# Altium PCB ES_Class6C_2L.PcbDoc
Units mm, origin at the board's own origin, x right, y up, seen from the top; angles counter-clockwise.
Board outline 40.52 x 188.15 mm, 4 copper layers (Top Layer, Layer 1, Layer 2, Bottom Layer), stack 1.536 mm thick; 112 components, 90 nets, 408 pads, 9 vias.
Unrouted connection lines stored in the file: 277.
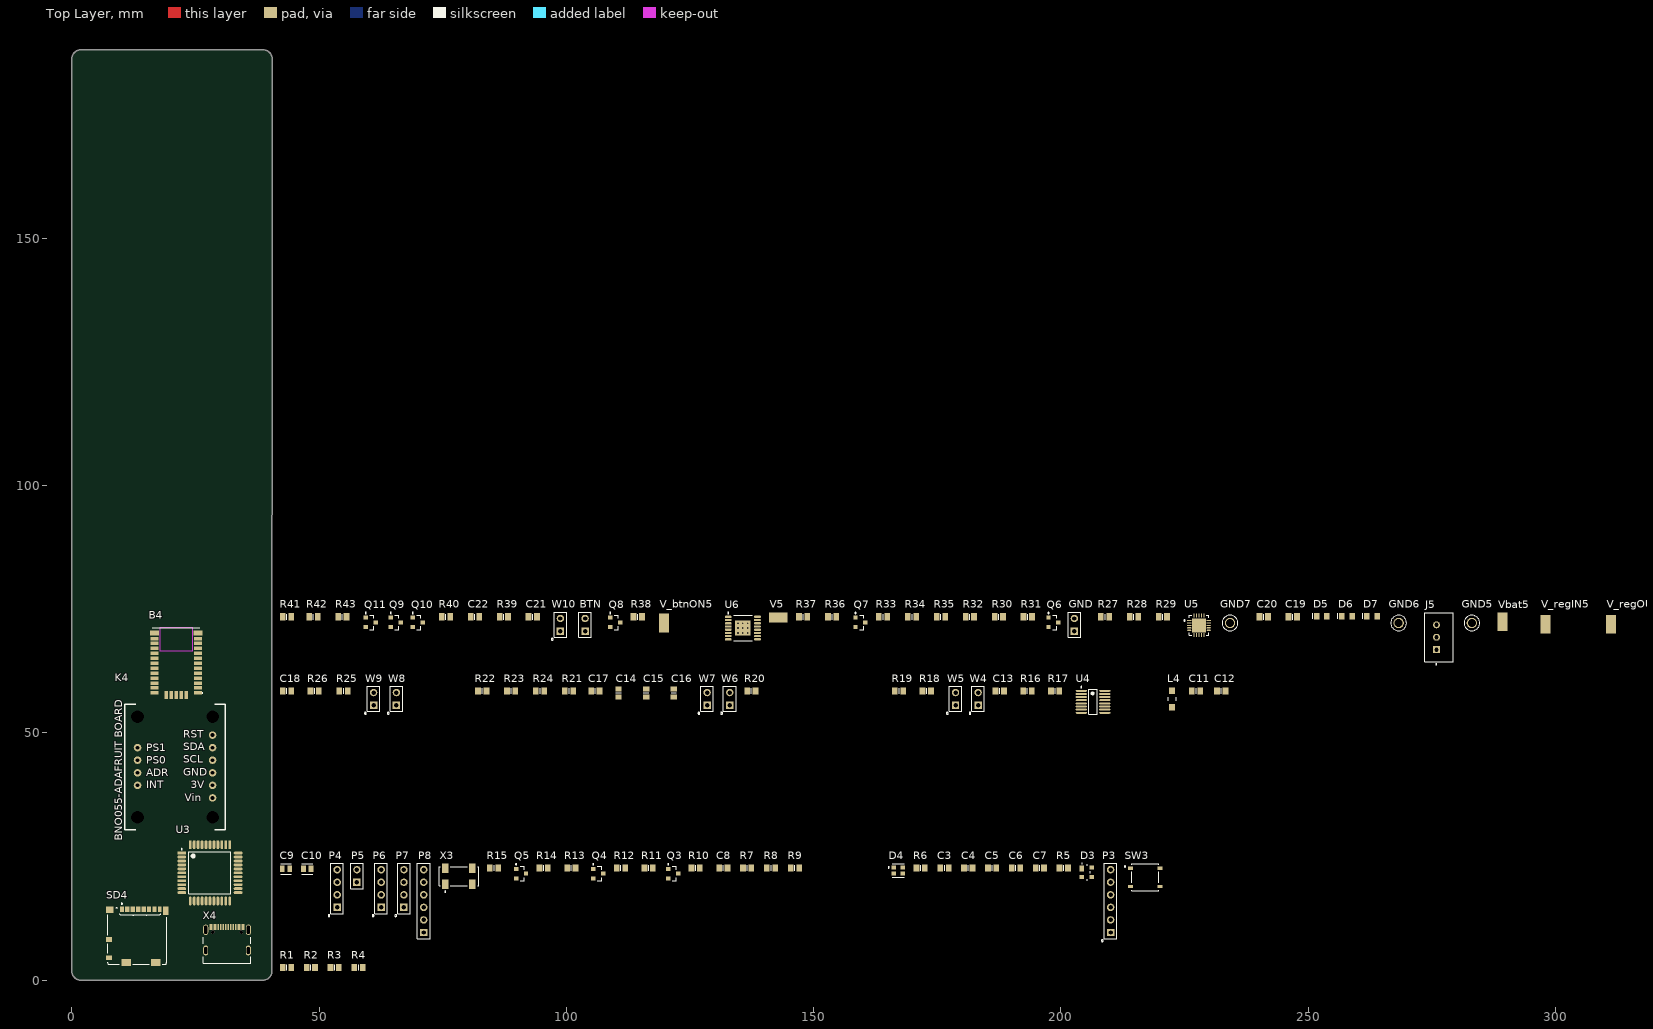
[diagram p0: Top Layer view]
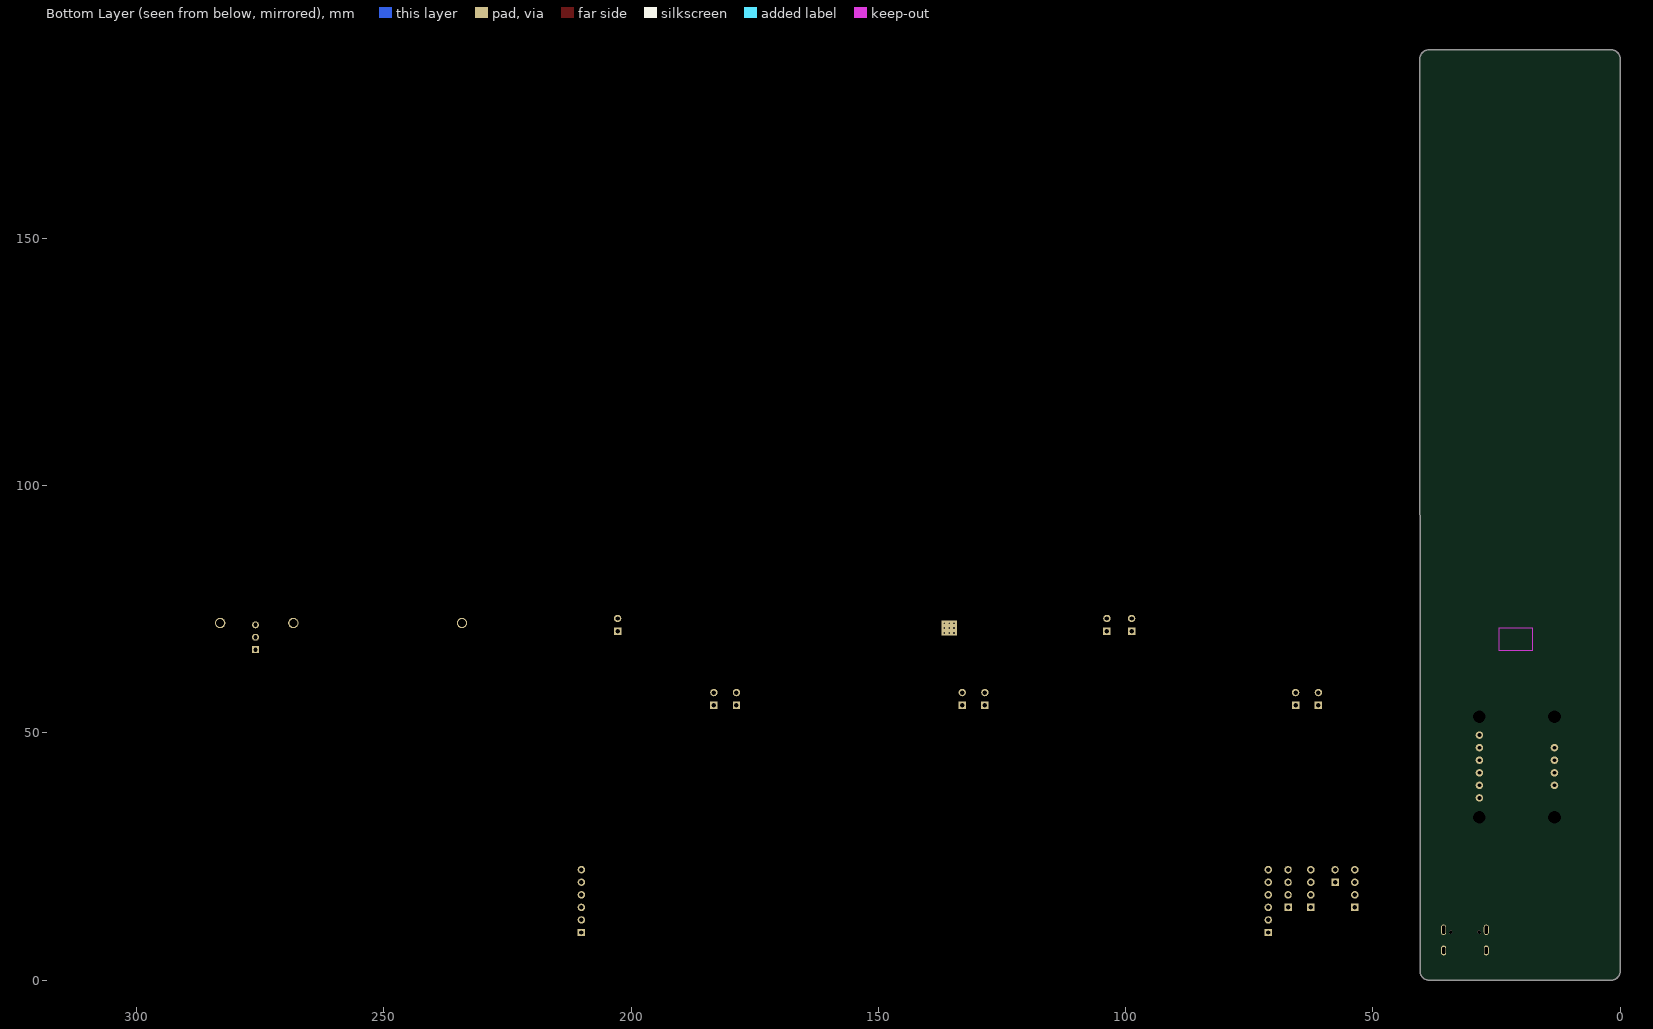
[diagram p1: Bottom Layer view, seen from below]

## Layer stack, top to bottom
Top Solder: solder mask 0.0102, Solder Resist, Dk 3.5
Top Layer: signal copper 0.018
Dielectric 1: prepreg 0.36, PP-001, Dk 3.9
Layer 1: signal copper 0.035
Dielectric1: core 0.71, FR-4, Dk 4.8
Layer 2: signal copper 0.035
Dielectric 2: prepreg 0.36, PP-001, Dk 3.9
Bottom Layer: signal copper 0.018
Bottom Solder: solder mask 0.0102, Solder Resist, Dk 3.5

## Board outline
1.85,0.012 cw(c1.85,1.863) 0,1.863 0.025,186.299 cw(c1.875,186.299) 1.875,188.15 38.645,188.15 cw(c38.645,186.275) 40.52,186.275 40.508,186.287 40.488,1.851 cw(c38.637,1.851) 38.637,0

## Design rules (kind name [scope] priority, off if disabled: settings)
BoardOutlineClearance [All] p1: gap=0.25 ignorepadtopadclearanceinfootprint=FALSE except(0: Arc-SplitContinuation Track-SplitContinuation SMDPad-SplitContinuation THPad-SplitContinuation Via-SplitContinuation Fill-SplitContinuation Poly-SplitContinuation Region-SplitContinuation Text-SplitContinuation)
Clearance Clearance-xPP-xTP-xTT [All] p1: gap=0.151 ignorepadtopadclearanceinfootprint=FALSE
ComponentClearance [All] p1: gap=0.25 collisioncheckmode=3 verticalgap=0.25 showdistances=FALSE
DiffPairsRouting [All] p1: maxlimit=0.25 minlimit=0.25 mostfreqgap=0.25 toplayer_minwidth=0.2 toplayer_maxwidth=0.381 toplayer_prefwidth=0.381 midlayer1_minwidth=0.2 midlayer1_maxwidth=0.381 midlayer1_prefwidth=0.381 midlayer2_minwidth=0.2 midlayer2_maxwidth=0.381 midlayer2_prefwidth=0.381 bottomlayer_minwidth=0.2 bottomlayer_maxwidth=0.381 bottomlayer_prefwidth=0.381 maxuncoupledlength=12.5
Height [All] p1: minheight=0 maxheight=25 prefheight=12.5
HoleSize HoleSize-PTH [All] p1: absolutevalues=TRUE maxlimit=10 minlimit=0.25 maxpercent=80.000 minpercent=20.000
HoleToHoleClearance [All] p1: gap=0.35 allowstackedmicrovias=TRUE
MinimumAnnularRing "Minimum IAR  >0.45mm" [((ObjectKind = 'Pad') OR (ObjectKind = 'Via')) And (Layer = 'MultiLayer') And (HoleDiameter > AsMM(0.45))] p1: minimumring=0.175 // minimum inner annular ring for pads > 0.45mm finished hole size
MinimumAnnularRing "Minimum IAR <=0.45mm" [((ObjectKind = 'Pad') OR (ObjectKind = 'Via')) And (Layer = 'MultiLayer') And (HoleDiameter <= AsMM(0.45))] p2: minimumring=0.175 // minimum inner annular ring for pads <= 0.45mm finished hole size
MinimumSolderMaskSliver [All] p1: minsoldermaskwidth=0.08
PasteMaskExpansion [All] p1: expansion=-0.025
PlaneClearance PlaneClearance-IPI [All] p1: clearance=0.25
PlaneConnect [All] p1: planeconnectstyle=Relief reliefexpansion=0.175 reliefentries=4 reliefconductorwidth=0.2 reliefairgap=0.2
PolygonConnect DirectVia [All vs IsNamedPolygon('GND_L01_P005') Or IsNamedPolygon('+3V3_L02_P000') Or IsNamedPolygon('GND_L03_P006') Or IsNamedPolygon('GND_L04_P008')] p1: thpad.connectstyle=Relief thpad.reliefconductorwidth=0.254 thpad.reliefentries=4 thpad.polygonreliefangle="90 Angle" thpad.airgapwidth=0.254 smdpad.connectstyle=Relief smdpad.reliefconductorwidth=0.254 smdpad.reliefentries=4 smdpad.polygonreliefangle="90 Angle" smdpad.airgapwidth=0.254 via.connectstyle=Direct via.reliefconductorwidth=0.254 via.reliefentries=4 via.polygonreliefangle="90 Angle" via.airgapwidth=0.254
PolygonConnect PolygonConnect-xTW [All] p2: connectstyle=Relief reliefconductorwidth=0.2 reliefentries=4 polygonreliefangle="90 Angle" airgapwidth=0.2
RoomDefinition U_Power [InComponentClass('U_Power')] p1: confinementstyle=ConfineIn formatcopy=TRUE lockcomponents=FALSE outline 41.644,63.486 323.932,63.486 323.932,77.187 41.644,77.187
RoomDefinition U_MCU [InComponentClass('U_MCU')] p2: confinementstyle=ConfineIn formatcopy=TRUE lockcomponents=FALSE outline 41.669,7.559 220.927,7.559 220.927,26.41 41.669,26.41
RoomDefinition SchemaBloc [InComponentClass('SchemaBloc')] p3: confinementstyle=ConfineIn formatcopy=TRUE lockcomponents=FALSE outline 41.644,1.408 59.969,1.408 59.969,6.284 41.644,6.284
RoutingCorners [All] p1: cornerstyle=45-Degree minsetback=2.5 maxsetback=2.5
RoutingVias RoutingViasES [All] p1: holewidth=0.3 width=0.65 viastyle="Through Hole" minholewidth=0.25 minwidth=0.61 maxholewidth=0.45 maxwidth=0.8 // finishet hole size <= 0.45mm
SilkToSilkClearance [All] p1: silktosilkclearance=0.2
SilkToSolderMaskClearance SilkscreenOverComponentPads [IsPad] p1: minsilkscreentomaskgap=0.2 clearancetoexposedcopper=TRUE
SolderMaskExpansion [All] p1: expansion=0 istentingtop=FALSE
UnRoutedNet [All] p1: checkbadconnections=TRUE
Width Width-xTW [All] p1: maxlimit=1.5 minlimit=0.15 preferedwidth=0.2
17 further rules are at their usual default settings.

## Classes and differential pairs
component class U_Power: BTN C19 C20 C21 C22 D5 D6 D7 GND GND5 GND6 GND7 GND? J5 MP5 MP6 MP7 MP8 MP9 Q6 Q7 Q8 Q9 Q10 Q11 R27 R28 R29 R30 R31 R32 R33 R34 R35 R36 R37 R38 R39 R40 R41 R42 R43 U5 U6 V5 V? V_btnON5 V_btnON? V_regIN5 V_regIN? V_regOUT5 V_regOUT? Vbat5 Vbat? W10
component class U_Peripherals: B4 C11 C12 C13 C14 C15 C16 C17 C18 K4 L4 R16 R17 R18 R19 R20 R21 R22 R23 R24 R25 R26 SD4 SD? U4 W4 W5 W6 W7 W8 W9 X4
component class U_MCU: C3 C4 C5 C6 C7 C8 C9 C10 D3 D4 P3 P4 P5 P6 P7 P8 Q3 Q4 Q5 R5 R6 R7 R8 R9 R10 R11 R12 R13 R14 R15 S3 SW3 U3 X3
component class SchemaBloc: R1 R2 R3 R4
differential pair D: +D_P -D_N
differential pair DR: +DR_P -DR_N

## Components (designator, comment, footprint, x,y, rotation, side; value= is the part's Value field where it differs from the comment)
B4 "CAM-M8C-0" CAMM8C0 21.125,64.3 r0 top
BTN "Button connector" HDR1X2 103.797,70.612 r90 top
C3 "100nF" Cap_0805 176.475,22.684 r0 top
C4 "100nF" Cap_0805 181.275,22.684 r0 top
C5 "100nF" Cap_0805 186.101,22.684 r0 top
C6 "100nF" Cap_0805 190.926,22.684 r0 top
C7 "100nF" Cap_0805 195.751,22.684 r0 top
C8 "10uF" Cap_0805 131.748,22.684 r0 top
C9 "C0805C180J5GACTU" FP-C0805C-DN-MFG 43.319,22.534 r0 top value="18 pF"
C10 "C0805C180J5GACTU" FP-C0805C-DN-MFG 47.619,22.534 r0 top value="18 pF"
C11 "100nF" Cap_0805 227.328,58.511 r0 top
C12 "4.7uF" Cap_0805 232.428,58.511 r0 top
C13 "100nF" Cap_0805 187.651,58.511 r0 top
C14 "10nF" 6-0805_L 110.547,58.086 r90 top
C15 "47pF" 6-0805_L 116.147,58.086 r90 top
C16 "47pF" 6-0805_L 121.722,58.086 r90 top
C17 "10nF" Cap_0805 105.872,58.511 r0 top
C18 "4.7uF" Cap_0805 43.519,58.511 r0 top
C19 "4.7uF, 35V" Cap_0805 246.879,73.487 r0 top
C20 "10uF, 10V" Cap_0805 241.028,73.487 r0 top value=10uF
C21 "4.7uF, 35V" Cap_0805 93.221,73.487 r0 top
C22 "6.8uF, 10V" Cap_0805 81.52,73.487 r0 top
D3 "BAS40-07" INF-SOT143_V 205.252,21.834 r0 top
D4 "ASMB-KTF0-0A306" FP-PLCC-4-MFG 167.1,22.209 r0 top
D5 "Super Red, 1.9 V" WL-SMCW_0805_150080xx75000 252.754,73.612 r0 top
D6 "Super Red, 1.9 V" WL-SMCW_0805_150080xx75000 257.854,73.612 r0 top
D7 "Super Red, 1.9 V" WL-SMCW_0805_150080xx75000 262.929,73.612 r0 top
GND "Header 2" HDR1X2 202.726,70.612 r90 top
GND5 "5011" KSTN-5011_V 283.105,72.237 r0 top
GND6 "5011" KSTN-5011_V 268.305,72.237 r0 top
GND7 "5011" KSTN-5011_V 234.203,72.237 r0 top
J5 "B3B-XH-A(LF)(SN)" FP-B3B-XH-A_LF_SN-MFG 276.48,69.362 r90 top
K4 "BNO055-ADAFRUIT" BNO055-ADAFRUIT 31.08,30.393 r90 top
L4 "742792133" SMD-1206 222.502,56.886 r90 top
P3 "Header 6" HDR1X6 210.052,9.659 r90 top
P4 "Header 4" HDR1X4 53.669,14.734 r90 top
P5 "Header 2" HDR1X2 57.669,19.809 r90 top
P6 "Header 4" HDR1X4 62.57,14.734 r90 top
P7 "Header 4" HDR1X4 67.17,14.734 r90 top
P8 "Header 6" HDR1X6 71.17,9.659 r90 top
Q3 "BSS138LT1G" ONSC-SOT-23-3-318-08_V 121.597,21.559 r0 top
Q4 "BSS138LT1G" ONSC-SOT-23-3-318-08_V 106.472,21.559 r0 top
Q5 "BSS138LT1G" ONSC-SOT-23-3-318-08_V 90.846,21.559 r0 top
Q6 "NVR1P02T1G" ONSC-SOT-23-3-318-08_V 198.501,72.362 r0 top
Q7 "BSS138LT1G" ONSC-SOT-23-3-318-08_V 159.474,72.362 r0 top
Q8 "NVR1P02T1G" ONSC-SOT-23-3-318-08_V 109.872,72.362 r0 top
Q9 "BSS138LT1G" ONSC-SOT-23-3-318-08_V 65.52,72.362 r0 top
Q10 "BSS138LT1G" ONSC-SOT-23-3-318-08_V 69.945,72.362 r0 top
Q11 "BSS138LT1G" ONSC-SOT-23-3-318-08_V 60.444,72.362 r0 top
R1 "50k" RES_0805 43.519,2.583 r0 top value=1k
R2 "50k" RES_0805 48.344,2.583 r0 top value=1k
R3 "50k" RES_0805 53.169,2.583 r0 top value=1k
R4 "50k" RES_0805 57.994,2.583 r0 top value=1k
R5 "47k" RES_0805 200.576,22.684 r0 top value=1K
R6 "1k" RES_0805 171.65,22.684 r0 top value=1K
R7 "430R" RES_0805 136.573,22.684 r0 top value=180R
R8 "430R" RES_0805 141.398,22.684 r0 top value=33R
R9 "430R" RES_0805 146.224,22.684 r0 top value=39R
R10 "430R" RES_0805 126.148,22.684 r0 top
R11 "10k" RES_0805 116.647,22.684 r0 top
R12 "430R" RES_0805 111.047,22.684 r0 top
R13 "10k" RES_0805 101.021,22.684 r0 top
R14 "430R" RES_0805 95.421,22.684 r0 top
R15 "10k" RES_0805 85.396,22.684 r0 top
R16 "5k1" RES_0805 193.251,58.511 r0 top
R17 "5k1" RES_0805 198.851,58.511 r0 top
R18 "27R" RES_0805 172.875,58.511 r0 top
R19 "27R" RES_0805 167.275,58.511 r0 top
R20 "10k" RES_0805 137.423,58.511 r0 top
R21 "15k" RES_0805 100.546,58.511 r0 top
R22 "10k" RES_0805 82.996,58.511 r0 top
R23 "10k" RES_0805 88.846,58.511 r0 top
R24 "10k" RES_0805 94.696,58.511 r0 top
R25 "220R" RES_0805 54.969,58.511 r0 top
R26 "220R" RES_0805 49.119,58.511 r0 top
R27 "270R" RES_0805 208.927,73.487 r0 top
R28 "270R" RES_0805 214.777,73.487 r0 top
R29 "270R" RES_0805 220.627,73.487 r0 top
R30 "39k" RES_0805 187.451,73.487 r0 top
R31 "39k" RES_0805 193.301,73.487 r0 top
R32 "39k" RES_0805 181.6,73.487 r0 top
R33 "10k" RES_0805 164.049,73.487 r0 top
R34 "6k2" RES_0805 169.9,73.487 r0 top
R35 "2.2k" RES_0805 175.75,73.487 r0 top
R36 "10k" RES_0805 153.749,73.487 r0 top
R37 "270R" RES_0805 147.899,73.487 r0 top
R38 "100k" RES_0805 114.447,73.487 r0 top
R39 "6k2" RES_0805 87.371,73.487 r0 top
R40 "10k" RES_0805 75.67,73.487 r0 top
R41 "39k" RES_0805 43.519,73.487 r0 top
R42 "10k" RES_0805 48.869,73.487 r0 top
R43 "10k" RES_0805 54.719,73.487 r0 top
SD4 "104031-0811" MOLX-104031-0811_V 13.253,8.988 r180 top
SW3 "PTS526SK15SMTR2LFS" FP-PTS526SK15SMTR2LFS-MFG 217.077,20.809 r0 top
U3 "PIC32MX274F256D-I/PT" FP-C04-076-IPC_A 27.95,21.725 r0 top
U4 "FT230XS-U" SSOP-16_N 206.502,56.311 r0 top
U5 "MCP73871T-2CCI/ML" Microchip_C04-126_IPC_B 227.928,71.762 r0 top
U6 "MAX1793EUE33+" TSOP65P640X110_HS-17N 135.698,71.212 r0 top
V5 "3.3V" KSTN-5019_V 142.873,73.387 r0 top
V_btnON5 "VBOI" KSTN-5019_V 119.722,72.237 r90 top
V_regIN5 "Vcharge" KSTN-5019_V 297.981,71.987 r90 top
V_regOUT5 "Vregu" KSTN-5019_V 311.207,71.987 r90 top
Vbat5 "Vbat" KSTN-5019_V 289.331,72.487 r90 top
W4 "Jumper" JUMPER 183.275,55.636 r90 top
W5 "Jumper" JUMPER 178.7,55.636 r90 top
W6 "Jumper" JUMPER 133.048,55.636 r90 top
W7 "Jumper" JUMPER 128.473,55.636 r90 top
W8 "Jumper" JUMPER 65.645,55.636 r90 top
W9 "Jumper" JUMPER 61.044,55.636 r90 top
W10 "Jumper" JUMPER 98.796,70.612 r90 top
X3 "ABS25-32.768KHZ-6-T" ABRA-ABS25-4_V 78.27,21.034 r0 top
X4 "USB4105-GF-A" GCT_USB4105-GF-A 31.4,6.025 r0 top

## Footprints (in the part's own frame and the unit in brackets; to place one, negate y for a bottom-side part, rotate by r counter-clockwise, add the part's x,y. Pads: shape width x height; smd on the part's side, far side on the other; paste and mask are expansions set on the pad)
6-0805_L [mm] "Chip Resistor, Body 2.0x1.2mm, IPC High Density"
  rect 1x1.3 smd: 1(-0.8,0) 2(0.8,0)
  silkscreen extent 0,-0.55 0,0.55, body extent -1.07,-0.7 1.07,0.7, height 0.7
ABRA-ABS25-4_V [mm] "SMD, 4-Leads, Body 8x3.8mm, Pitch 5.5mm, Height 2.5mm"
  rect 1.3x1.9 smd: 1(-2.75,-1.6) 2(2.75,-1.6) 3(2.75,1.6) 4(-2.75,1.6)
  silkscreen extent -4,-3.22 4,1.9, body extent -4,-2 4,2, height 2.66
BNO055-ADAFRUIT [mil]
  round 60 hole 30: 1(255,102.5) 2(355,102.5) 3(455,102.5) 4(555,102.5) 5(655,102.5) 6(755,102.5) 7(355,700.02) 8(455,700.02) 9(555,700.02) 10(655,700.02)
  round 60 hole 100: M(100,700) M(100,100) M(900,100) M(900,700)
  silkscreen extent 0,0 1000,800, body extent 5,3 1005,803, height 539
CAMM8C0 [mm]
  rect 1.6x0.7 smd: 1(4.425,-6.2) 2(4.425,-5.2) 3(4.425,-4.2) 4(4.425,-3.2) 5(4.425,-2.2) 6(4.425,-1.2) 7(4.425,-0.2) 8(4.425,0.8) 9(4.425,1.8) 10(4.425,2.8) 11(4.425,3.8) 12(4.425,4.8) 15(-4.425,4.8) 16(-4.425,3.8) 17(-4.425,2.8) 18(-4.425,1.8) 19(-4.425,0.8) 20(-4.425,-0.2) 21(-4.425,-1.2) 22(-4.425,-2.2) 23(-4.425,-3.2) 24(-4.425,-4.2) 25(-4.425,-5.2) 26(-4.425,-6.2)
  rect 1.8x1 smd: 13(4.425,5.95) 14(-4.425,5.95)
  rect 0.7x1.6 smd: 27(-2,-6.625) 28(-1,-6.625) 29(0,-6.625) 30(1,-6.625) 31(2,-6.625)
  Keep-Out Layer region: -3.302,2.286 3.302,2.286 3.302,6.985 -3.302,6.985
  silkscreen extent -4.8,-6.25 5.4,7, body extent -4.83,-7 4.77,7, height 2.19
Cap_0805 [mm]
  rect 1.15x1.45 smd: 1(-0.85,0) 2(0.85,0)
  silkscreen extent 0,-0.55 0,0.55, body extent -0.95,-0.6 1.05,0.65, height 0.94
FP-B3B-XH-A_LF_SN-MFG [mm]
  rect 1.4x1.4 hole 0.9 paste-1000 mask+0: 1(-2.5,0.525)
  round 1.4 hole 0.9 paste-1000 mask+0: 2(0,0.525) 3(2.5,0.525)
  silkscreen extent -5.6,-2.88 4.95,2.88, body extent -5.05,-2.98 5.05,2.98, height 0.25
FP-C04-076-IPC_A [mm]
  rect 1.788x0.566 smd paste+0 mask+0: 1(-5.691,4)
  rrect100% 1.788x0.566 smd paste+0 mask+0: 2(-5.691,3.2) 3(-5.691,2.4) 4(-5.691,1.6) 5(-5.691,0.8) 6(-5.691,0) 7(-5.691,-0.8) 8(-5.691,-1.6) 9(-5.691,-2.4) 10(-5.691,-3.2) 11(-5.691,-4) 23(5.691,-4) 24(5.691,-3.2) 25(5.691,-2.4) 26(5.691,-1.6) 27(5.691,-0.8) 28(5.691,0) 29(5.691,0.8) 30(5.691,1.6) 31(5.691,2.4) 32(5.691,3.2) 33(5.691,4)
  rrect100% 0.566x1.788 smd paste+0 mask+0: 12(-4,-5.691) 13(-3.2,-5.691) 14(-2.4,-5.691) 15(-1.6,-5.691) 16(-0.8,-5.691) 17(0,-5.691) 18(0.8,-5.691) 19(1.6,-5.691) 20(2.4,-5.691) 21(3.2,-5.691) 22(4,-5.691) 34(4,5.691) 35(3.2,5.691) 36(2.4,5.691) 37(1.6,5.691) 38(0.8,5.691) 39(0,5.691) 40(-0.8,5.691) 41(-1.6,5.691) 42(-2.4,5.691) 43(-3.2,5.691) 44(-4,5.691)
  silkscreen extent -5.82,-4.25 4.25,4.92, body extent -7.09,-7.09 7.09,7.09, height 0.25
FP-C0805C-DN-MFG [mm]
  rect 0.95x1.35 smd paste+0 mask+0: 1(-0.75,0) 2(0.75,0)
  silkscreen extent -1.1,-1.07 1.1,1.07, body extent -1.4,-0.85 1.4,0.85, height 0.25
FP-PLCC-4-MFG [mm]
  rect 0.9x0.8 smd paste+0 mask+0: 1(-0.9,0.6) 2(-0.9,-0.6) 3(0.9,-0.6) 4(0.9,0.6)
  silkscreen extent -2.02,-1.4 1.2,1.4, body extent -1.45,-1.2 1.45,1.2, height 0.25
FP-PTS526SK15SMTR2LFS-MFG [mm]
  rect 1x0.7 smd paste+0 mask+0: 1(-3,1.85) 2(3,1.85) 3(-3,-1.85) 4(3,-1.85)
  silkscreen extent -4.25,-2.7 2.7,2.7, body extent -3.6,-2.8 3.6,2.8, height 0.25
GCT_USB4105-GF-A [mm]
  rect 0.6x1.15 smd: A1B12(-3.2,4.755) A4B9(-2.4,4.755) B1A12(3.2,4.755) B4A9(2.4,4.755)
  rect 0.3x1.15 smd: A5(-1.25,4.755) A6(-0.25,4.755) A7(0.25,4.755) A8(1.25,4.755) B5(1.75,4.755) B6(0.75,4.755) B7(-0.75,4.755) B8(-1.75,4.755)
  oval 1.05x2.1 hole 0.6 slot 1.7 at 90 deg: S1(-4.32,4.18) S4(4.32,4.18)
  oval 1x2 hole 0.6 slot 1.4 at 90 deg: S2(-4.32,0) S3(4.32,0)
  round 0.65 hole 0.65 unplated: ""(-2.89,3.68) ""(2.89,3.68)
  silkscreen extent -4.79,-2.6 4.79,2.65, body extent -4.47,-2.59 4.47,5.11, height 3.26
HDR1X2 [mm] "Connector; Header; 2 Position"
  rect 1.5x1.5 hole 0.9: 1(0,0)
  round 1.5 hole 0.9: 2(2.54,0)
  silkscreen extent -1.27,-1.27 3.81,1.27
HDR1X4 [mm] "Connector; Header; 4 Position"
  rect 1.5x1.5 hole 0.9: 1(0,0)
  round 1.5 hole 0.9: 2(2.54,0) 3(5.08,0) 4(7.62,0)
  silkscreen extent -1.85,-1.27 8.89,1.85, body extent -1.27,-1.27 8.89,1.27, height 9.5
HDR1X6 [mm] "Connector; Header; 6 Position"
  rect 1.5x1.5 hole 0.9: 1(0,0)
  round 1.5 hole 0.9: 2(2.54,0) 3(5.08,0) 4(7.62,0) 5(10.16,0) 6(12.7,0)
  silkscreen extent -1.85,-1.27 13.97,1.85, body extent -1.27,-1.27 13.97,1.27, height 9.5
INF-SOT143_V [mm] "SOT143, 4-Leads, Body 2.9x1.3 mm"
  rect 0.9x1.2 smd: 1(-1,0.8)
  rect 0.9x0.8 smd: 2(-1,-1) 3(1,-1) 4(1,1)
  silkscreen extent -1.05,-1.5 0.7,1.85, body extent -0.65,-1.45 0.65,1.45, height 1.1
JUMPER [mm] "Connector; Header; 2 Position"
  rect 1.5x1.5 hole 0.9: 1(0,0)
  round 1.5 hole 0.9: 2(2.54,0)
  silkscreen extent -1.85,-1.27 3.81,1.85, body extent -1.33,-1.27 3.87,1.27, height 8.6
KSTN-5011_V [mm] "Test Point, Dia 3.17mm"
  round 2.1 hole 1.6: 1(0,0)
  silkscreen extent -1.59,-1.58 1.59,1.58, body extent -1.59,-1.59 1.59,1.59, height 8.13
KSTN-5019_V [mm] "Test Point, 1-Leads, Body 3.81x2.03mm"
  rect 3.8x2.03 smd: 1(0,0)
  body extent -1.9,-1.01 1.9,1.02, height 2.29
Microchip_C04-126_IPC_B [mm]
  rect 0.829x0.239 smd paste+0 mask+0: 1(-1.97,1)
  rrect100% 0.829x0.239 smd paste+0 mask+0: 2(-1.97,0.5) 3(-1.97,0) 4(-1.97,-0.5) 5(-1.97,-1) 11(1.97,-1) 12(1.97,-0.5) 13(1.97,0) 14(1.97,0.5) 15(1.97,1)
  rrect100% 0.239x0.829 smd paste+0 mask+0: 6(-1,-1.97) 7(-0.5,-1.97) 8(0,-1.97) 9(0.5,-1.97) 10(1,-1.97) 16(1,1.97) 17(0.5,1.97) 18(0,1.97) 19(-0.5,1.97) 20(-1,1.97)
  rect 2.8x2.8 smd paste-1000 mask+0: 21(0,0)
  silkscreen extent -3.05,-2 2,2, body extent -2.54,-2.5 2.72,2.76, height 0.25
MOLX-104031-0811_V [mm] "Micro SD, 8-Leads, Body 11.95x11.4mm, Pitch 1.1mm"
  rect 0.85x1.1 smd: 1(3.113,-5.412) 2(2.013,-5.412) 3(0.913,-5.412) 4(-0.188,-5.412) 5(-1.288,-5.412) 6(-2.387,-5.412) 7(-3.487,-5.412)
  rect 0.75x1.1 smd: 8(-4.537,-5.412)
  rect 1.2x1 smd: 9(5.748,0.738) 10(5.748,4.438)
  rect 1.55x1.35 smd: 11(5.573,-5.287)
  rect 1.17x1.8 smd: 12(-5.747,-5.062)
  rect 1.9x1.35 smd: 13(-3.722,5.413) 14(2.248,5.413)
  silkscreen extent -5.97,-6.64 5.98,5.74, body extent -5.97,-5.66 5.98,5.74, height 1.45
ONSC-SOT-23-3-318-08_V [mm] "SOT23, 3-Leads, Body 2.92x1.3mm, Pitch 0.95mm"
  rect 0.9x0.8 smd: 1(-1,0.95) 2(-1,-0.95) 3(1,0)
  silkscreen extent -1.12,-1.46 0.65,2.02, body extent -0.65,-1.46 0.65,1.46, height 1.11
RES_0805 [mm]
  rect 1.15x1.45 smd: 1(-0.85,0) 2(0.85,0)
  silkscreen extent 0,-0.55 0,0.55, body extent -0.97,-0.64 1.03,0.62, height 0.51
SMD-1206 [mm] "Chip Inductor, 2-Leads, Body 3.2x1.6mm"
  rect 1.35x1.2 smd: 1(-1.675,0) 2(1.675,0)
  silkscreen extent -0.35,-0.8 0.35,0.8, body extent -1.6,-0.8 1.6,0.8, height 1.09
SSOP-16_N [mm] "SOP, 16-Leads, Body 4.9x3.9mm, Pitch 0.635mm, IPC Medium Density"
  oval 2.25x0.4 smd: 1(-2.375,2.222) 2(-2.375,1.587) 3(-2.375,0.953) 4(-2.375,0.318) 5(-2.375,-0.318) 6(-2.375,-0.953) 7(-2.375,-1.587) 8(-2.375,-2.222) 9(2.375,-2.222) 10(2.375,-1.587) 11(2.375,-0.953) 12(2.375,-0.318) 13(2.375,0.318) 14(2.375,0.953) 15(2.375,1.587) 16(2.375,2.222)
  silkscreen extent -2.5,-2.5 0.9,3.1, body extent -1.99,-2.5 1.99,2.5, height 1.76
TSOP65P640X110_HS-17N [mm] "TSOP, 16-Leads, Body 5.00x4.40mm, Pitch 0.65mm, Thermal Pad 3.10x3.10mm, IPC Medium Density"
  oval 1.4x0.45 smd: 1(-2.95,2.275) 2(-2.95,1.625) 3(-2.95,0.975) 4(-2.95,0.325) 5(-2.95,-0.325) 6(-2.95,-0.975) 7(-2.95,-1.625) 8(-2.95,-2.275) 9(2.95,-2.275) 10(2.95,-1.625) 11(2.95,-0.975) 12(2.95,-0.325) 13(2.95,0.325) 14(2.95,0.975) 15(2.95,1.625) 16(2.95,2.275)
  rect 3.1x3.1 smd: 10(0,0)
  rect 3.1x3.1 smd far side: 10(0,0)
  silkscreen extent -3.07,-2.55 1.85,3.17, body extent -3.19,-2.55 3.19,2.55, height 1.1
WL-SMCW_0805_150080xx75000 [mm] "SMD Mono-color Chip LED, body 2.0x1.25mm"
  rect 1.1x1.3 smd: 1(-1.05,0) 2(1.05,0)
  silkscreen extent -2,-0.6 -1.8,0.6, body extent -1,-0.63 1,0.62, height 0.7

## Part data
B4: "RF RCVR GNSS/GPS 1.575GHZ MODULE", Manufacturer_Name=U-Blox, Mouser Part Number=377-CAM-M8C-0, Supplier Part Number 1=672-CAM-M8C-0CT-ND, Datasheet Link=https://www.mouser.cn/ProductDetail/u-blox/CAM-M8C-0?qs=%2Fha2pyFadui7ZmsGRBrJBt%252BuEsnOsR2xV%252BdWTisaE9ttYO2aX8ol3A%3D%3D, Geometry.Height=2.3mm, Manufacturer_Part_Number=CAM-M8C-0, Mouser Price/Stock=https://www.mouser.co.uk/ProductDetail/u-blox/CAM-M8C-0?qs=vEM7xhTegWh0Qdx4vzEerw%3D%3D, Supplier 1=Digi-Key
BTN: library part "Header 2", "Header, 2-Pin", LatestRevisionDate=17-Jul-2002, LatestRevisionNote="Re-released for DXP Platform.", Publisher="Altium Limited"
C3 C4 C5 C6 C7 C8 C11 C12 C13 C18: library part C, PCB Footprint=RC0805, SDTSourceLibName=C:\WINDOWS\TEMP\DA.LIB
C9 C10: library part CMP-2007-00302-2, "CAP CER 18PF 50V C0G/NP0 0805", Capacitance="18 pF", Manufacturer=KEMET, Package=C0805C-DN, Temperature="-55°C to +125°C", Temperature Characteristic=C0G, Temperature Coefficient=30ppm/°C, Temperature Range High=+125°C, Temperature Range Low=-55°C, Tolerance=0.05, Voltage Rating="50 V", Automotive=No, Category=Cap, ComponentLink2Description=Datasheet, ComponentLink2URL=https://content.kemet.com/datasheets/KEM_C1003_C0G_SMD.pdf, Device Class L1="Passive Components", Device Class L2=Capacitors, Device Class L3="Ceramic Capacitors", Digikey Description="CAP CER 18PF 50V C0G/NP0 0805", Height=0.88mm, Ipc Land Pattern Name=CAPC200125X78, Lead Free=Yes, Manufacturer Part Number=C0805C180J5GACTU, Material=Ceramic, Mouser Description="Cap Ceramic 18pF 50V C0G 5% SMD 0805 125C Paper T/R", Octopart=https://octopart.com/c0805c180j5gactu-kemet-144810, RoHS=TRUE
C14 C15 C16 C17: library part Cap, "Capacitor", LatestRevisionDate=17-Jul-2002, LatestRevisionNote="Re-released for DXP Platform.", PackageDescription="Radial Cap, Thru-Hole; 2 Leads; 0.3 in Pin Spacing", PackageReference=RAD-0.3, Published=8-Jun-2000, Publisher="Altium Limited"
C19 C21: library part CMP-08246-002735-1, "Multilayer Ceramic Capacitors 4.7μF ±10% 35V X7R SMD 0805", Capacitance=4.7uF, Case Code (Imperial)=0805, Case Code (Metric)=2012, Dielectric=X7R, Dielectric Material=Ceramic, Max Operating Temperature=125°C, Min Operating Temperature=-55°C, Package Quantity=2000, Tolerance=10%, Voltage Rating=35V, Case/Package=0805, Construction=Flat, Depth=1.25mm, Height=1.25mm, Lead Free="Lead Free", Length=2mm, Mount="Surface Mount", Packaging="Tape and Reel", Radiation Hardening=No, REACH SVHC="No SVHC", RoHS Compliant=Yes, Series=C, Termination=SMD/SMT, Thickness=0.057inch, Voltage Rating (DC)=35V, Weight=0.000194oz, Width=0.049inch
C20: library part CMP-2007-03243-2, "CAP CER 10UF 10V X5R 0805", 3DS Part Number=220-00001, Capacitance=10uF, Manufacturer=Kemet, Manufacturer Part Number=C0805C106K8PACTU, Package=C0805C-DG, Temperature="-55°C to +85°C", Temperature Characteristic=X5R, Temperature Coefficient=15%, Temperature Range High=+85°C, Temperature Range Low=-55°C, Tolerance=10%, Voltage=10V, Automotive=No, Category=Cap, ComponentLink2Description=Datasheet, ComponentLink2URL=https://content.kemet.com/datasheets/KEM_C1006_X5R_SMD.pdf, Device Class L1="Passive Components", Device Class L2=Capacitors, Device Class L3="Ceramic Capacitors", Digikey Description="CAP CER 10UF 10V X5R 0805", Height=1.4mm, Ipc Land Pattern Name=CAPC200125X125, Lead Free=Yes, Material=Ceramic, Mouser Description="CAP CER 10UF 10V X5R 0805", Octopart=https://octopart.com/c0805c106k8pactu-kemet-98697, RoHS=TRUE, Voltage Rating=10V
C22: library part CMP-08246-000118-1, "Cap Ceramic 6.8uF 10V X5R 20% Pad SMD 0805 +85°C Automotive T/R", Capacitance=6.8uF, Case Code (Imperial)=0805, Case Code (Metric)=2012, Dielectric=X5R, Max Operating Temperature=85°C, Min Operating Temperature=-55°C, Package Quantity=2000, Ratings=AEC-Q200, Tolerance=20%, Voltage Rating=10V, Case/Package=0805, Height=1.25mm, Length=0.079inch, Mount="Surface Mount", Packaging="Tape and Reel", Thickness=0.057inch, Voltage Rating (DC)=10V, Weight=0.000194oz, Width=0.049inch
D3: library part CMP-1182-00009-1, "Silicon Schottky Diode, -55 to 150 degC, SOT143, Reel, Green", Manufacturer=Infineon, ComponentLink1Description="Manufacturer URL", ComponentLink1URL=http://www.infineon.com/, ComponentLink2Description=Datasheet, ComponentLink2URL=http://www.infineon.com/dgdl/bas40_bas140series.pdf?folderId=db3a30431400ef68011425f1ca2505e3&fileId=db3a304314dca389011518a57ed20e11, ComponentLink3Description="Package Specification", ComponentLink3URL=http://www.infineon.com/dgdl/SOT143-Package_Overview.pdf?folderId=db3a30431936bc4b011952ce8b1b3bed&fileId=db3a30431936bc4b011952df42203c0c, Configuration=Dual, CT (max)="5Â pF", Green=TRUE, IF (max)="120Â mA", Mounting Technology="Surface Mount", PackageDescription="4-Pin Small Outline Transistor Package, 1.3 x 2.9 mm Body", PackageReference=SOT143, Packing=Reel, PartNumber=BAS40-07, VF (max)="1,000Â mV", VR (max)="40Â V"
D4: library part CMP-18399-000003-1, "LED RGB 4PLCC SMD", Colour="Blue, Green, Red", Forward Current=10/15/15mA, Forward Voltage=2.85/2.95/2V, Manufacturer=Broadcom, Max Junction Temp=+100°C, Package=PLCC-4, Power Dissipation=66/66/48mW, Reverse Voltage=4V, Temperature="-40°C to +85°C", Temperature Range High=+85°C, Temperature Range Low=-40°C, Automotive=No, Category=Diode, ComponentLink2Description=Datasheet, ComponentLink2URL=https://docs.broadcom.com/docs/ASMB-KTF0-0A306-DS100, Device Class L1=Optoelectronics, Device Class L2=LEDs, Device Class L3=unset, Digikey Description="LED RGB 4PLCC SMD", Height=2.1mm, Lead Free=Yes, Led Orientation="Top View", Luminous Intensity=215/1100/490mcd, Manufacturer Part Number=ASMB-KTF0-0A306, Mouser Description="LED Multi-Color Chip Red/Green/Blue 620nm/524nm/471nm 20mA 4-Pin PLCC T/R", Octopart=https://octopart.com/asmb-ktf0-0a306-broadcom-87157377, Peak Emmision Wavelength=467/518/628nm, RoHS=TRUE, Viewing Angle=110°, Wavelength=471/524/620nm
D5 D6 D7: library part 150080SS75000, "SMT Mono-color Chip LED Waterclear WL-SMCW, size 0805, Super Red, 1.9 V, 140 deg, 60 mcd", Emitting Color="Super Red", Forward Voltage="1.9 V", Operating Temperature="-40 to 85 degC", Supplier Part Number 1=732-4985-1-ND, Chip Technology=AlInGaP, ComponentLink1Description=Manufacturer, ComponentLink1URL=http://www.we-online.de, ComponentLink2Description=Datasheet, ComponentLink2URL=https://katalog.we-online.de/led/datasheet/150080SS75000.pdf, Dominant Wavelength="630 nm", Luminous Intensity="60 mcd", Mounting Technology=SMT, Packaging="Tape and Reel", Part Number=150080SS75000, Peak Wavelength="645 nm", Published Date="November 2018", Publisher="Wurth Elektronik", Size=0805, Supplier 1=Digi-Key, Supplier 2=Distrelec, Supplier Part Number 2=30008875, Viewing Angle="140 deg"
GND P5: "Header, 2-Pin", LatestRevisionDate=17-Jul-2002, LatestRevisionNote="Re-released for DXP Platform.", Publisher="Altium Limited"
GND5 GND6 GND7: library part CMP-1672-00003-4, "Test Point, Black, Through Hole, RoHS, Bulk", Colour=Black, Manufacturer=Keystone, Package Quantity=100, ComponentLink1Description="Manufacturer URL", ComponentLink1URL=http://www.keyelco.com/, ComponentLink2Description=Datasheet, ComponentLink2URL=http://www.keyelco.com/product-pdf.cfm?p=1320, Contact Material=Bronze, Contact Plating=Silver, DatasheetVersion="Rev. F, 12/2013", Height="8.12 mm", Mount="Through Hole", Mounting Technology="Through Hole", PackageDescription="1-Pin Through Hole Device, Dia 3.17 mm", PackageReference=5011, Packaging=Bulk, Pins=1, REACH SVHC="No SVHC", RoHSCompliant=true
J5: library part CMP-17439-000014-3, "CONN HEADER VERT 3POS 2.5MM", Color=Natural, Contact Resistance=20mR, Current Rating=3A, Flammability Rating="UL94 V-0", Housing Color=White, Insulation Resistance=1GR, Max Operating Temperature=85°C, Max Voltage Rating (AC)=250V, Min Operating Temperature=-25°C, Connector Type=Header, Contact Finish - Mating=TIN, Contact Material=Brass, Contact Plating=Tin, Contact Shape=Square, Contact Type="Male Pin", Depth=5.75mm, Fastening Type=Detent, Gender=Male, Housing Material=Polyamide, Insulation Color=Natural, Insulation Material=Nylon, Lead Free="Lead Free", Lead Pitch=2.5mm, Length=9.9mm, Max Current Rating=3A, Max Voltage Rating (DC)=250V, Mount="Through Hole", Number of Contacts=3, Number of Positions=3, Number of Rows=1, Orientation=Straight, Packaging=Bulk, Pitch=2.5mm, REACH SVHC="No SVHC", Series=XH, Termination=Solder, Voltage Rating=250V, Voltage Rating (AC)=250V, Wire/Cable Gauge=22AWG
L4: library part CMP-0220-00010-1, "SMD EMI Suppression Ferrite Bead WE-CBF, Z = 600 Ohm", ComponentLink1Description="Manufacturer Link", ComponentLink1URL=http://www.we-online.com, ComponentLink2Description=Datasheet, ComponentLink2URL=http://www.we-online.de/katalog/media/pdf/742792133.pdf, DatasheetVersion="ver 2, Aug-2007", Impedance="600 Ohm", PackageDescription="Chip Inductor, 2-Leads, Body 3.2 x 1.6 mm", PackageReference=SMD-1206, PackageVersion=2007
P3 P8: "Header, 6-Pin", LatestRevisionDate=17-Jul-2002, LatestRevisionNote="Re-released for DXP Platform.", Publisher="Altium Limited"
P4 P6 P7: "Header, 4-Pin", LatestRevisionDate=17-Jul-2002, LatestRevisionNote="Re-released for DXP Platform.", Publisher="Altium Limited"
Q3 Q4 Q5 Q7 Q9 Q10 Q11: library part CMP-1058-00767-1, "Power MOSFET, 200 mA, 50 V, N-Channel, 3-Pin SOT-23, Pb-Free, Tape and Reel", Manufacturer="On Semiconductor", Package Type=SOT-23-3, Channel Polarity="N Channel", Ciss Typ (pF)=40, ComponentLink1Description="Manufacturer URL", ComponentLink1URL=http://www.onsemi.com/, ComponentLink2Description=Datasheet, ComponentLink2URL=http://www.onsemi.com/pub_link/Collateral/BSS138LT1-D.PDF, ComponentLink3Description="Package Specification", ComponentLink3URL=http://www.onsemi.cn/pub_link/Collateral/318-08.PDF, Configuration=Single, Coss Typ (pF)=12, Crss Typ (pF)=3.5, DatasheetVersion="Rev. 8", ID Max (A)=0.2, Mounting Technology="Surface Mount", PackageDescription="3-Pin Small Outline Transistor, Body 2.92 x 1.3 mm, Pitch 0.95 mm", PackageReference=SOT-23-3-318-08, PackageVersion="Rev. AP, 11/2009", Packing="Tape and Reel", PartNumber=BSS138LT1G, PD Max (W)=0.225, RoHS=Pb-Free, V(BR)DSS Min (V)=50, VGS Max (V)=20, VGS(th) Max (V)=1.5
Q6 Q8: library part CMP-1058-00745-1, "Power MOSFET, -20 V, -1 A, P-Channel, 3-Pin SOT-23, Pb-Free, Tape and Reel", Manufacturer="On Semiconductor", Package Type=SOT-23-3, Channel Polarity="P Channel", Ciss Typ (pF)=165, ComponentLink1Description="Manufacturer URL", ComponentLink1URL=http://www.onsemi.com/, ComponentLink2Description=Datasheet, ComponentLink2URL=http://www.onsemi.cn/pub_link/Collateral/NTR1P02T1-D.PDF, ComponentLink3Description="Package Specification", ComponentLink3URL=http://www.onsemi.cn/pub_link/Collateral/318-08.PDF, Configuration=Single, Coss Typ (pF)=110, Crss Typ (pF)=35, DatasheetVersion="Rev. 7", ID Max (A)=1, Mounting Technology="Surface Mount", PackageDescription="3-Pin Small Outline Transistor, Body 2.92 x 1.3 mm, Pitch 0.95 mm", PackageReference=SOT-23-3-318-08, PackageVersion="Rev. AP, 11/2009", Packing="Tape and Reel", PartNumber=NVR1P02T1G, PD Max (W)=0.4, Qrr Typ (nC)=8, RoHS=Pb-Free, V(BR)DSS Min (V)=20, VGS Max (V)=20, VGS(th) Max (V)=2.3
R1 R2 R3 R4 R5 R6 R7 R8 R9 R10 R11 R12 R13 R14 R15 R16 R17 R18 R19 R20 R21 R22 R23 R24 R25 R26: library part Res2, "Res 0805", LatestRevisionDate=17-Jul-2002, LatestRevisionNote="Re-released for DXP Platform.", PackageDescription="Axial Device, Thru-Hole; 2 Leads; 0.4 in Pin Spacing", PackageReference=AXIAL-0.4, Published=8-Jun-2000, Publisher="Altium Limited"
R27 R28 R29 R37: library part CMP-2001-00528-1, "Res 0805", Manufacturer=Panasonic, Part Number=ERJ6ENF2703V
R30 R31 R32 R41: library part CMP-2001-00410-1, "Res 0805", Manufacturer=Panasonic, Part Number=ERJ-6GEYJ393V
R33 R36 R40 R42 R43: library part CMP-2001-04376-1, "Res 0805", Manufacturer=Panasonic, Part Number=ERJ-6ENF1002V
R34: library part CMP-2001-04031-1, "Res 0805", Manufacturer="Vishay Dale", Part Number=CRCW08055K60JNEA
R35: library part CMP-1013-00510-2, "Res 0805", Manufacturer="Vishay Dale", Part Number=CRCW08051K00FKEA
R38: library part CMP-2001-00479-1, "Res 0805", Manufacturer=Panasonic, Part Number=ERJ-P06J104V
R39: library part CMP-2001-00562-1, "Res 0805", Manufacturer=Panasonic, Part Number=ERJ6ENF6201V
SD4: library part CMP-2000-05825-1, "Micro SD Card, RA, -25 to 85 degC, 8-Pin SMD, RoHS, Tape and Reel", Current Rating=500mA, Manufacturer=Molex, Package Description="8-Pin Surface Mount Device, Body 11.95 x 11.4 mm, Pitch 1.1 mm", Voltage Rating=10VAC/DC, Brand=Molex, Card Type=microSD, Contact Material=PhosphorBronze, Contact Plating=Gold, Datasheet URL=http://www.molex.com/pdm_docs/sd/1040310811_sd.pdf, Datasheet Version="Rev. E, 04/2006", Height=1.42mm, Housing Material=LiquidCrystalPolymer(LCP), Insertion - Extraction Style=Push-Pull, Length=11.4mm, Manufacturer URL=http://www.molex.com/, Mating Cycles=10000, Mounting Technology=SurfaceMount, Mounting Type=Standard, Number of Contacts=8, Number of Rows=1Row, Orientation=RightAngle, Package Reference=104031-0811, Packaging=Reel, Pitch=1.1mm, Product=CardConnectors, Product Category=MemoryCardConnectors, RoHS=True, Series=104031, Termination Style=SMD
SW3: library part CMP-10040-000013-1, "TACT 5.2 X 5.2, 1.5 MM H, 260GF,", Contact Current Rating=50mA, Contact Resistance=100mΩ, Manufacturer=C&K, Operating Force=250gf, Temperature="-20°C to +70°C", Temperature Range High=+70°C, Temperature Range Low=-20°C, Voltage Rating Dc=12V, Automotive=No, Category=Switch, ComponentLink2Description=Datasheet, ComponentLink2URL=https://www.ckswitches.com/media/2780/pts526.pdf, Device Class L1=Electromechanical, Device Class L2=Switches, Device Class L3="Tactile Switches", Digikey Description="TACT 5.2 X 5.2, 1.5 MM H, 260GF,", Electromechanical Life=200000Cycles, Height=1.65mm, Lead Free=Yes, Manufacturer Part Number=PTS526SK15SMTR2LFS, Octopart=https://octopart.com/pts526+sk15+smtr2+lfs-c%26k+components-100617999, Package=PTS526SK15SMTR2LFS, RoHS=TRUE, Standoff Height=0mm, Throw Configuration=SPST-NO
U3: library part CMP-06276-000357-1, "IC MCU 32BIT 256KB FLASH 44TQFP"
U4: library part CMP-0248-00025-2, "USB to Basic UART Interface Chip, UHCI/OHCI/EHCI Compatible, USB 2.0 Compatible, -40 to +85 degC, 16-Pin SSOP, Pb-Free, Tube", Manufacturer=FTDI, Code_JEDEC=MO-137-AB, ComponentLink1Description="Manufacturer URL", ComponentLink1URL=http://www.ftdichip.com/, ComponentLink2Description=Datasheet, ComponentLink2URL=http://www.ftdichip.com/Support/Documents/DataSheets/ICs/DS_FT230X.pdf, ComponentLink3Description="FT230X Product Page", ComponentLink3URL=www.ftdichip.com/Products/ICs/FT230X.html, DatasheetVersion="ver 1.2, Feb-2013", PackageDescription="16-Pin Small Outline Package, 8.6 x 3.9 mm Body, 0.635 mm Pitch", PackageReference=SSOP-16, PackageVersion=Feb-13, PartNumber=FT230XS-U, RevisionNote="DatasheetVersion updated to 1.2 Feb-2013"
U5: "Charger IC Lithium Ion/Polymer 20-QFN _4x4_", Package="QFN-20 Microchip", Digi-Key_Part_Number=MCP73871T-2CCI/MLCT-ND, Digi-Key_Purchase_URL=https://www.digikey.com/product-detail/en/microchip-technology/MCP73871T-2CCI-ML/MCP73871T-2CCI-MLCT-ND/7065594?utm_source=snapeda&utm_medium=aggregator&utm_campaign=symbol, MF=Microchip, MP=MCP73871T-2CCI/ML, SnapEDA_Link=https://www.snapeda.com/parts/MCP73871T-2CCI/ML/Microchip/view-part/1049920/?ref=snap
V5 V_btnON5 V_regIN5 V_regOUT5 Vbat5: library part CMP-1672-00008-1, "Test Point, 1 Position SMD, RoHS, Tape and Reel", Package Quantity=1000, ComponentLink1Description="Manufacturer URL", ComponentLink1URL=http://www.keyelco.com/, ComponentLink2Description=Datasheet, ComponentLink2URL=http://www.keyelco.com/product-pdf.cfm?p=1357, Contact Plating=Silver, DatasheetVersion=03/2014, Mount="Surface Mount", Mounting Technology="Surface Mount", PackageDescription="1-Pin Surface Mount Device, Body 3.81 x 2.03 mm", PackageReference=5019, Packaging="Tape and Reel", Pins=1, RoHSCompliant=True
W4 W5 W6 W7 W8 W9 W10: "Jumper Wire", LatestRevisionDate=17-Jul-2002, LatestRevisionNote="Re-released for DXP Platform.", PackageDescription="Radial Cap, Thru-Hole; 2 Leads; 0.2 in Pin Spacing", PackageReference=RAD-0.2, Published=24-Mar-1999, Publisher="Altium Limited"
X3: library part CMP-2000-05036-1, "Low Frequency Crystal, 32.768 KHz, 6 pF, +/- 20 ppm, -40 to 85 degC, 4-Pin SMD, RoHS, Tape and Reel", Case Height=2.5mm, Case Length=8mm, Case Width=3.8mm, Frequency=32.768kHz, Load Capacitance=6pF, Manufacturer=Abracon, Operating Temperature Range=-40Cto+85C, Package / Case=8mmx3.8mm, Package Description="4-Pin Surface Mount Device, Body 8 x 3.8 mm, Pitch 5.5 mm", Package Reference=ABS25, Tolerance=20PPM, Brand=ABRACON, Datasheet URL=https://datasheet.ciiva.com/854/abs25-854528.pdf, Datasheet Version=Jun-17, Dimensions=3.8mmWx8mmLx2.5mmH, ESR=50kOhms, Factory Pack Quantity=3000, Manufacturer URL=http://www.abracon.com/, Mounting Style=SMD/SMT, Packaging=Reel, Product Category=Crystals, RoHS=Details, Series=ABS25, Termination Style=SMD/SMT, Type=LowFrequencyCrystal
X4: library part "USB-C Type 2.0", "USB4105-GF-A USB connector", Supplier Part Number 1=C319148, ComponentLink1Description="LCSC  C319148", ComponentLink1URL=https://lcsc.com/product-detail/USB-Connectors_XKB-Connectivity-U262-161N-4BVC11_C319148.html, Supplier 1=LCSC

## Via types
v1: diameter 0.75, hole 0.35, Top Layer to Bottom Layer, 9 vias

## Nets (pads, with @x,y where several pads share a name; then routed paths per layer and width w, separated by ;. In a path a pad name is that pad's centre, name@x,y a point inside that pad or via, vN(x,y) a via of type N, cw(c..) or ccw(c..) an arc to the next point about the centre after c; other vN are vias at no path point)
+3V3: B4.1 B4.8 B4.9 C3.1 C4.1 C5.1 C6.1 C7.1 C11.1 C12.1 C18.1 C22.1 D3.2 D4.1 P3.2 R1.2 R2.2 R3.2 R4.2 R5.1 R38.1 SD4.4 U3.10 U3.17 U3.28 U3.40 U6.12 U6.13 U6.14 U6.15 V5.1 W7.1
BAT_LVL: R31.1 R32.2 U3.19
BAT_READ: R37.1 U3.20
BAT_STAT: R27.1 U3.30 U5.8
Button_MF: Q11.1 R40.1 R41.2 U3.13
CS_SD: P6.1 SD4.2 U3.12
D_N: C16.2 R19.1 X4.A7 X4.B7
D_P: C15.2 R18.1 X4.A6 X4.B6
DR_N: R19.2 U4.9
DR_P: R18.2 U4.8
GND: B4.4 B4.5 B4.10 B4.11 B4.12 B4.13 B4.14 B4.15 B4.18 B4.19 B4.21 B4.22 B4.27 B4.31 C3.2 C4.2 C5.2 C6.2 C7.2 C8.2 C9.2 C10.2 C11.2 C12.2 C13.2 C14.1 C15.1 C16.1 C17.1 C18.2 C19.2 C20.2 C21.2 C22.2 GND5.1 GND6.1 GND7.1 GND.1 GND.2 J5.1 K4.3 P3.3 Q3.2 Q4.2 Q5.2 Q7.2 Q9.2 Q10.2 Q11.2 R11.1 R13.1 R15.1 R16.2 R17.2 R21.1 R22.1 R23.1 R24.1 R32.1 R33.1 R34.1 R35.1 R36.1 R41.1 R42.1 R43.1 SD4.6 SW3.3 SW3.4 U3.6 U3.16 U3.29 U3.39 U4.5 U4.13 U5.9 U5.10 U5.11 U5.21 U6.10 U6.11 X4.A1B12 X4.B1A12
  other v1: 134.698,70.212 135.698,70.212 136.698,70.212 134.698,71.212 135.698,71.212 136.698,71.212 134.698,72.212 135.698,72.212 136.698,72.212
INT_IMU: K4.7 P7.1 Q10.1 R43.2 U3.36
LED_B: R10.2 U3.26
LED_G: R12.2 U3.25
LED_R: R14.2 U3.35
MCLR: D3.1 P3.1 R6.1
MISO: P6.2 SD4.7 U3.41
MOSI: P6.3 SD4.3 U3.11
NC1: P8.1 U3.8
NC2: P8.2 U3.9
NC3: P8.3 U3.3
NC4: P8.4 U3.5
NC5: P8.5 U3.42
NC6: P8.6 U3.15
NetB4_3: B4.3 W8.2
NetB4_6: B4.6 W9.2
NetB4_16: B4.16 B4.17
NetB4_25: B4.25 R25.2
NetB4_26: B4.26 R26.2
NetBTN_1: BTN.1 R40.2
NetC8_1: C8.1 U3.7
NetC13_1: C13.1 U4.3 U4.10
NetC14_2: C14.2 L4.2 X4.A4B9 X4.B4A9
NetC17_2: C17.2 R20.1 R21.2 U4.11
NetC21_1: C21.1 U6.2 U6.3 U6.4 U6.5 U6.7 W10.2
NetD4_2: D4.2 R9.1
NetD4_3: D4.3 R8.1
NetD4_4: D4.4 R7.1
NetD5_1: D5.1 R27.2
NetD6_1: D6.1 R28.2
NetD7_1: D7.1 R29.1
NetK4_1: K4.1 W6.2
NetK4_2: K4.2 W7.2
NetK4_8: K4.8 R24.2
NetK4_9: K4.9 R23.2
NetK4_10: K4.10 R22.2
NetQ3_1: Q3.1 R10.1 R11.2
NetQ3_3: Q3.3 R7.2
NetQ4_1: Q4.1 R12.1 R13.2
NetQ4_3: Q4.3 R8.2
NetQ5_1: Q5.1 R14.1 R15.2
NetQ5_3: Q5.3 R9.2
NetQ6_1: Q6.1 Q7.3 R30.1
NetQ6_3: Q6.3 R31.2
NetQ7_1: Q7.1 R37.2
NetQ8_1: Q8.1 Q9.3 Q10.3 Q11.3 R39.1
NetR16_1: R16.1 X4.A5
NetR17_1: R17.1 X4.B5
NetR28_1: R28.1 U5.7
NetR29_2: R29.2 U5.6
NetR33_2: R33.2 U5.5
NetR34_2: R34.2 U5.12
NetR35_2: R35.2 U5.13
NetR36_2: R36.2 U5.3
NetR38_2: R38.2 U6.6
NetU4_2: U4.2 W4.1
NetU4_6: U4.6 W5.1
NetU5_14: U5.14 U5.16
PGEC2: P3.5 U3.22
PGED2: P3.4 U3.21
PWR_HOLD: Q9.1 R42.2 U3.31
Reset: D3.3 D3.4 R5.2 R6.2 SW3.1 SW3.2 U3.18
RST_IMU: K4.6 P7.2 U3.38
SCK: P6.4 SD4.5 U3.14
SCL1: K4.4 P7.4 R4.1 U3.44
SCL2: R2.1 U3.24 W9.1
SDA1: K4.5 P7.3 R3.1 U3.1
SDA2: R1.1 U3.23 W8.1
SOSCI: C10.1 U3.33 X3.4
SOSCO: C9.1 U3.34 X3.1
U1CTS: P4.3 U3.32 W4.2
U1RTS: P4.2 U3.27 W5.2
U1RX: P4.1 U3.2 U4.1
U1TX: P4.4 U3.43 U4.4
U2RX: P5.1 R25.1 U3.4
U2TX: P5.2 R26.1 U3.37
VBAT: C20.1 J5.3 Q6.2 R30.2 U5.15 Vbat5.1
VBO: BTN.2 C19.1 Q8.2 R39.2 U5.1 U5.20 V_regOUT5.1 W6.1
VBOI: Q8.3 V_btnON5.1 W10.1
VBUS_5V: D5.2 D6.2 D7.2 L4.1 R20.2 U4.12 U5.2 U5.4 U5.17 U5.18 U5.19 V_regIN5.1
pads on no net: B4.2 B4.7 B4.20 B4.23 B4.24 B4.28 B4.29 B4.30 J5.2 K4.M P3.6 SD4.1 SD4.8 SD4.9 SD4.10 SD4.11 SD4.12 SD4.13 SD4.14 U4.7 U4.14 U4.15 U4.16 U6.1 U6.8 U6.9 U6.16 X3.2 X3.3 X4. X4.A8 X4.B8 X4.S1 X4.S2 X4.S3 X4.S4

## Silkscreen, mask and mechanical layers (free items; w line width, h text height)
Board Outline (ES):
  lines w0.254: 2.575,2.925 37.575,2.925 37.575,72.925 2.575,72.925 2.575,2.925

## Text inside footprints (layer, text, board x,y; h text height)
K4: Top Overlay "BNO055-ADAFRUIT BOARD" at 10.252,28.234 h1.52 r90; Top Overlay "Vin" at 22.825,36.235 h1.52; Top Overlay "3V" at 24.095,38.8 h1.52; Top Overlay "GND" at 22.571,41.366 h1.52; Top Overlay "SCL" at 22.571,43.931 h1.52; Top Overlay "SDA" at 22.571,46.497 h1.52; Top Overlay "RST" at 22.571,49.062 h1.52; Top Overlay "INT" at 15.079,38.775 h1.52; Top Overlay "ADR" at 15.079,41.273 h1.52; Top Overlay "PS0" at 15.079,43.77 h1.52; Top Overlay "PS1" at 15.079,46.268 h1.52
X4: Top 3D Body "PCB EDGE" at 36.8,3.525 h0.41